# Altium PCB Ad Hoc Radio Node 2005 v5.PCBDOC
Units mm, origin at the board's own origin, x right, y up, seen from the top; angles counter-clockwise.
Board outline 127 x 101.6 mm, 4 copper layers (Top Layer, Internal Plane 1, Internal Plane 2, Bottom Layer); 68 components, 77 nets, 276 pads, 22 vias.
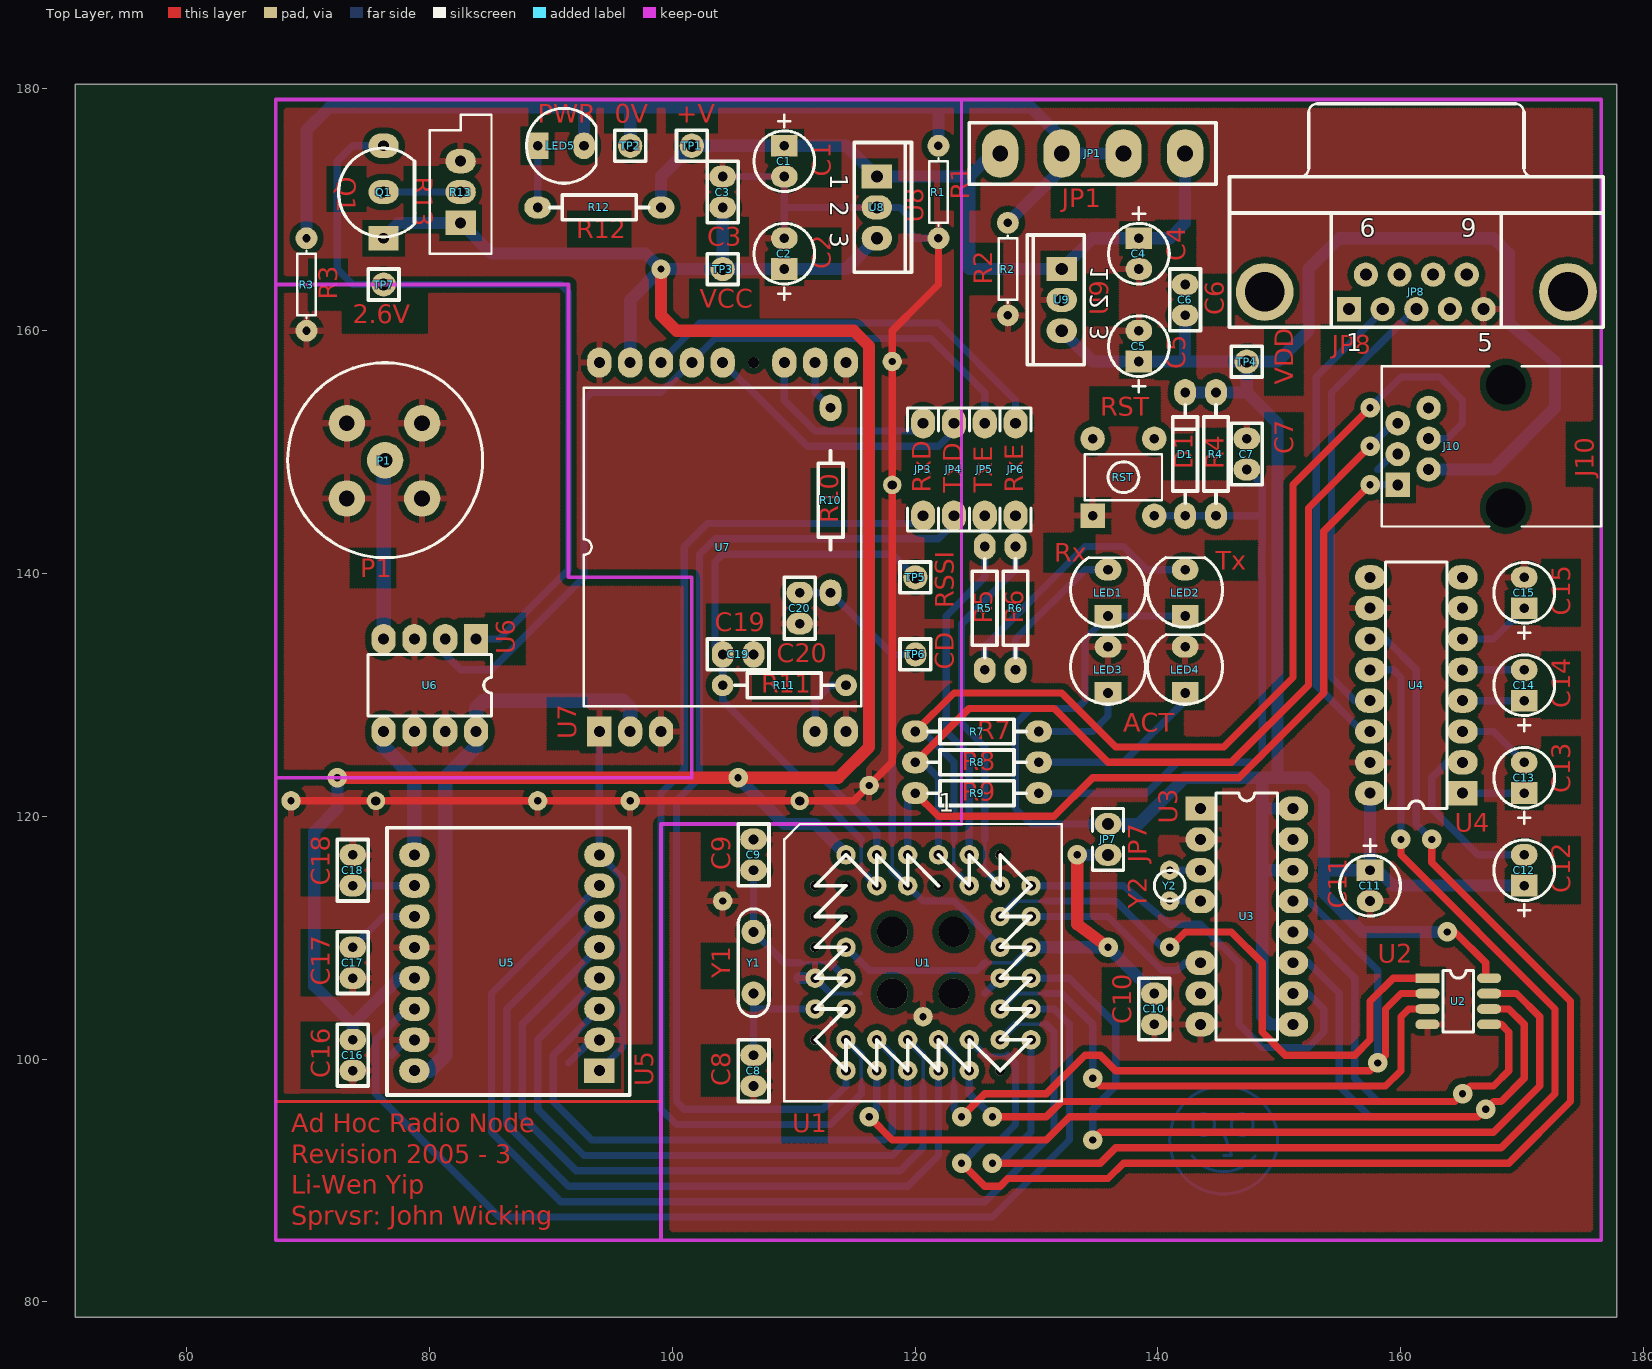
[diagram p0: Top Layer view]
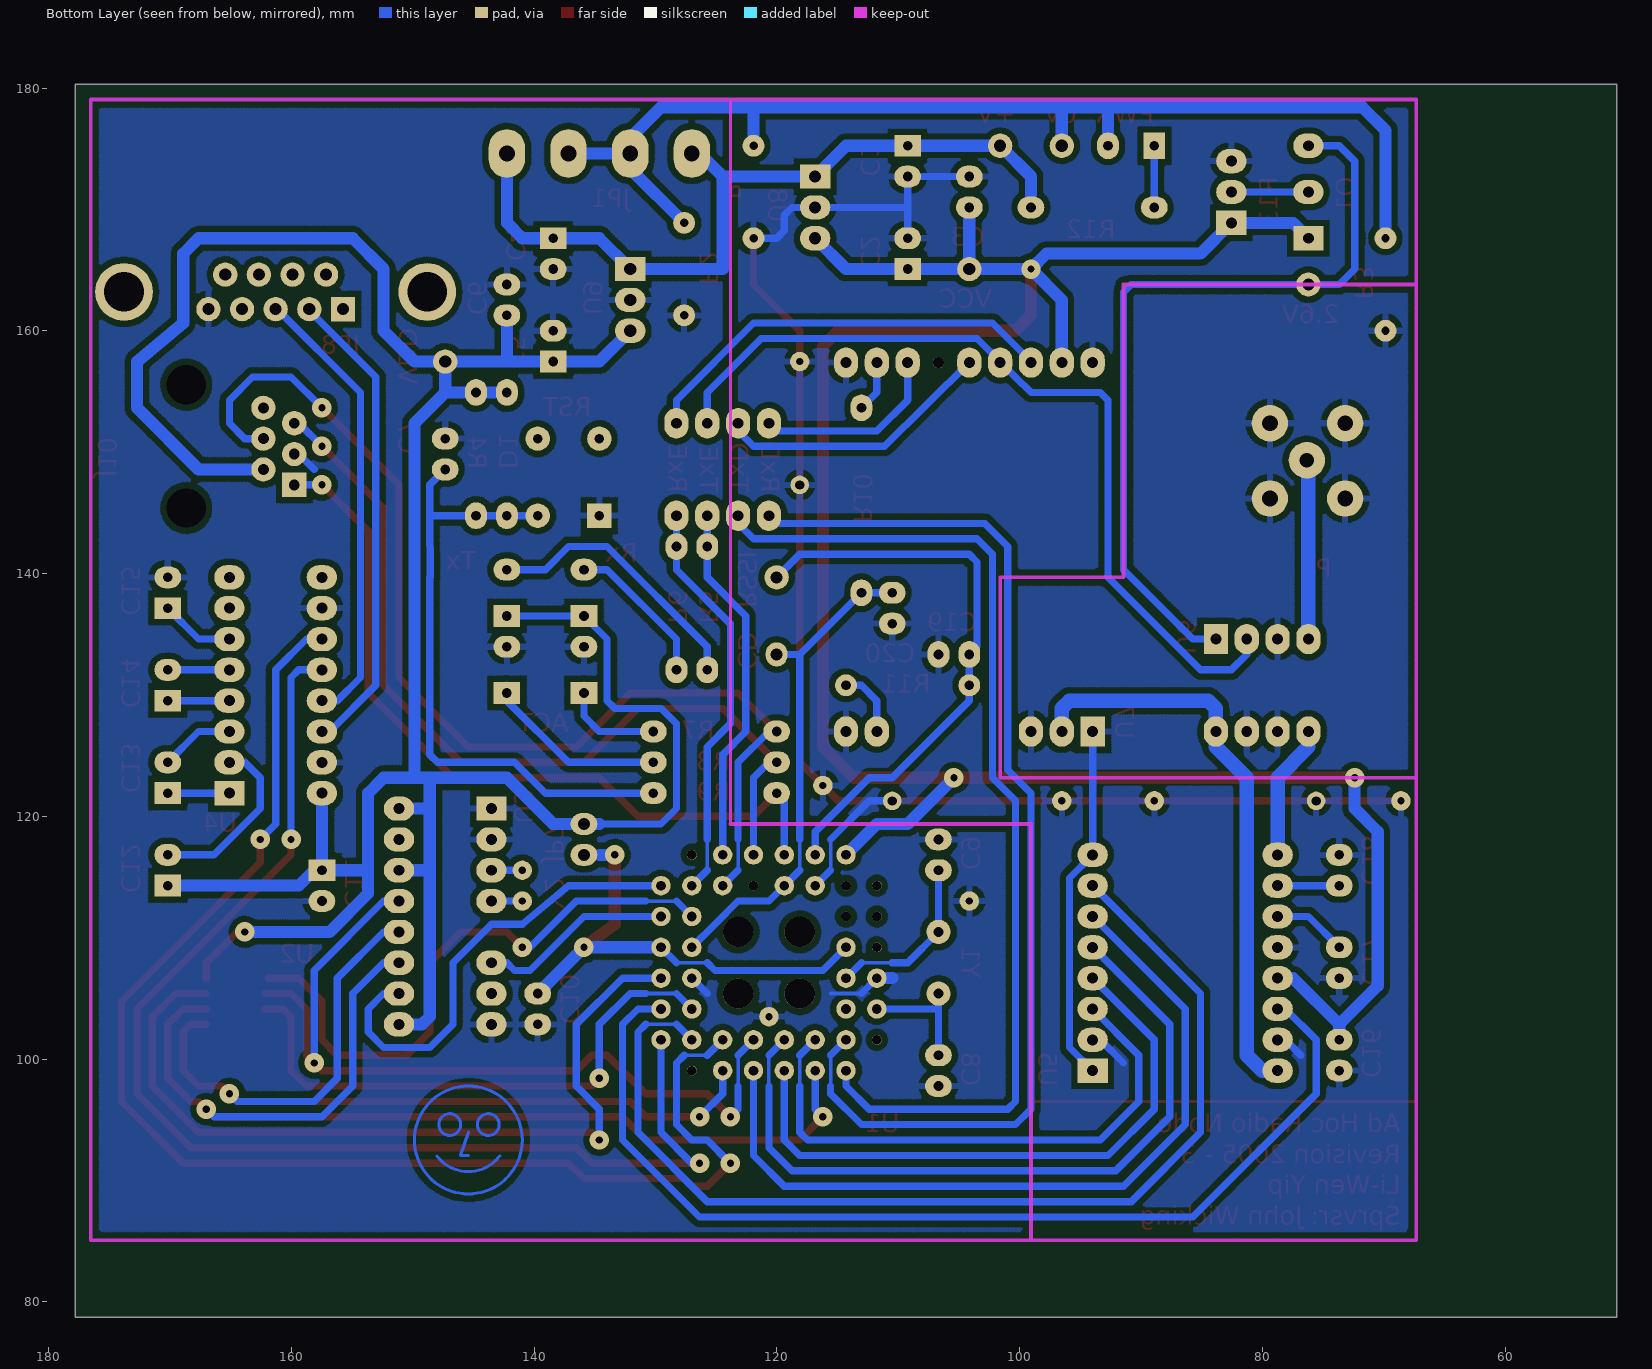
[diagram p1: Bottom Layer view, seen from below]
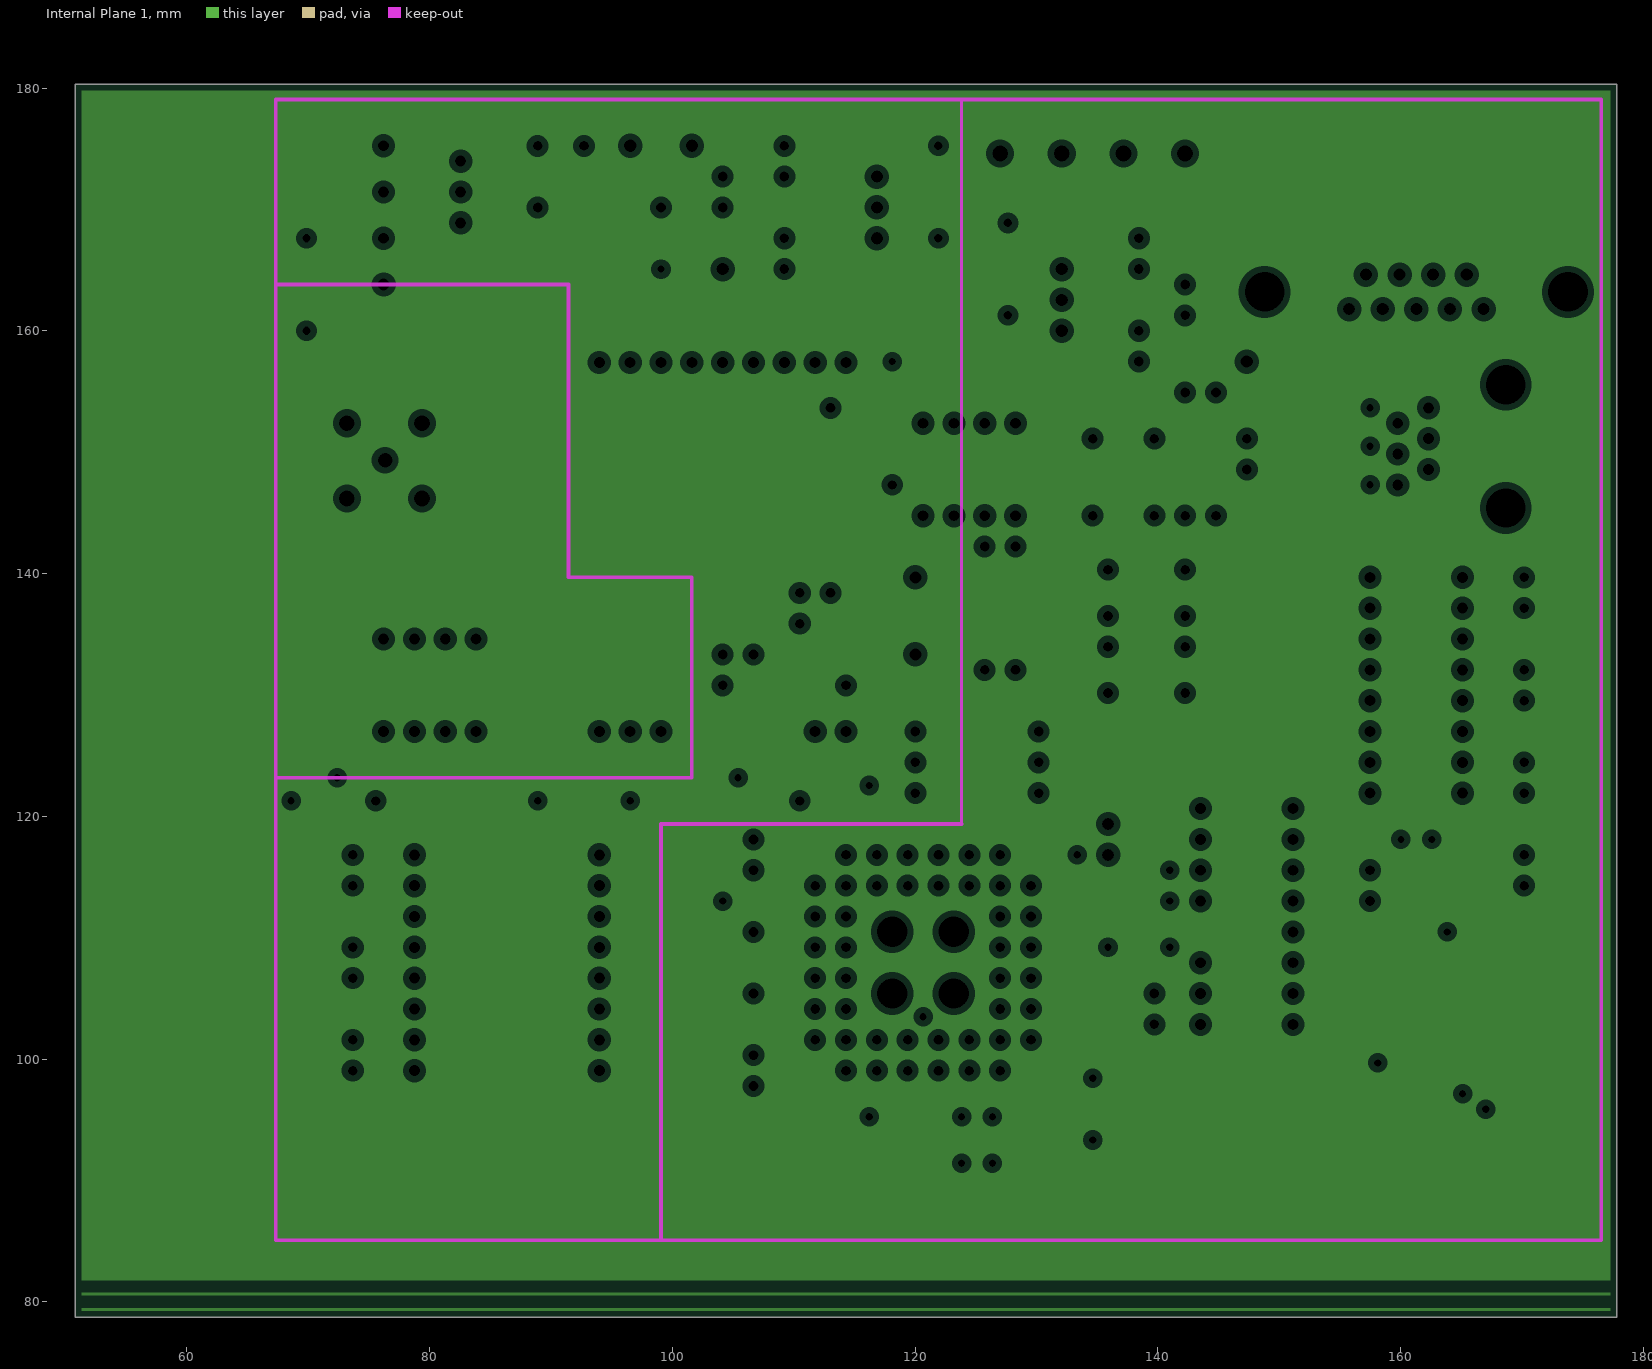
[diagram p2: Internal Plane 1, clearances drawn from the general rule]
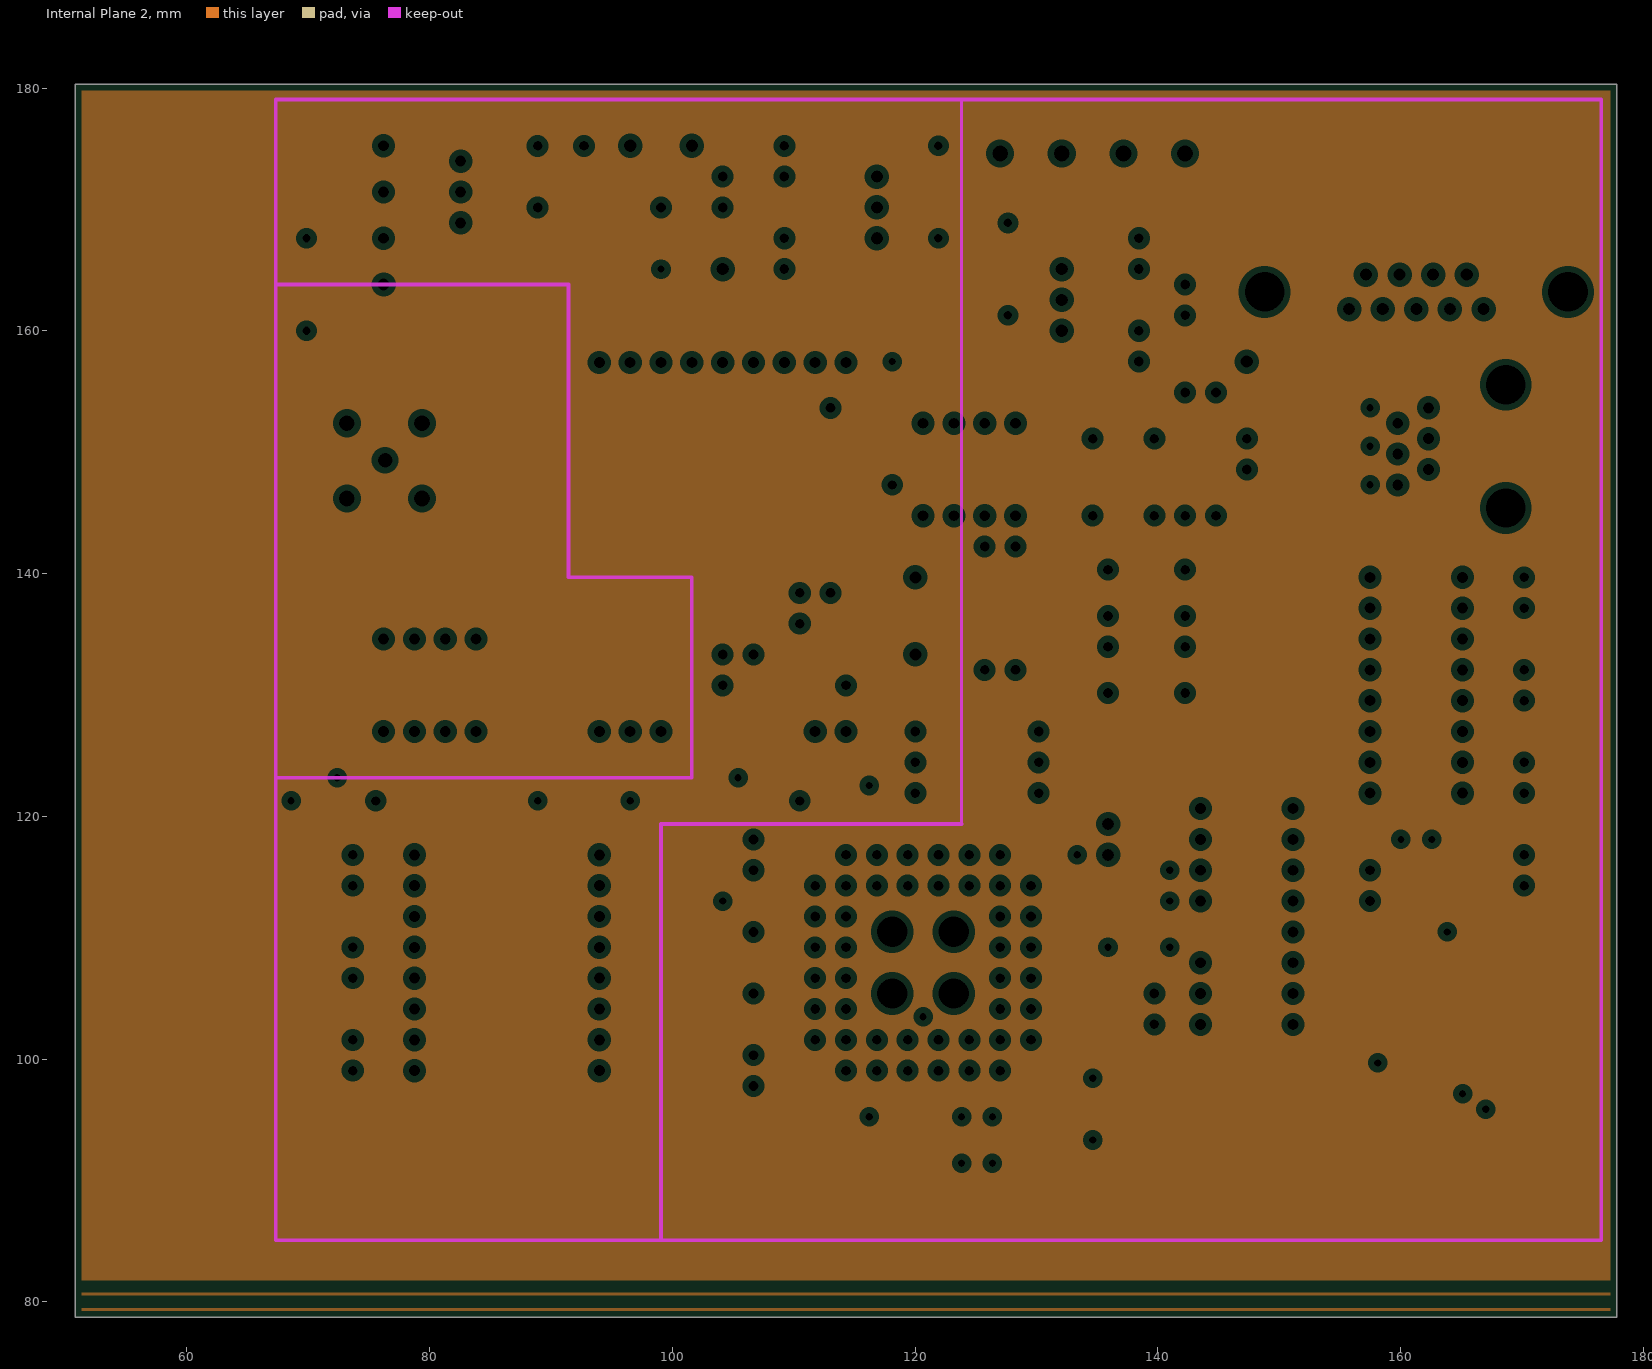
[diagram p3: Internal Plane 2, clearances drawn from the general rule]

## Layer stack, top to bottom
Top Layer: signal copper 0.0356
Dielectric: dielectric 0.32, FR-4, Dk 4.8
Internal Plane 1: plane copper 0.0356
Dielectric: dielectric 0.32, FR-4, Dk 4.8
Internal Plane 2: plane copper 0.0356
Dielectric: dielectric 0.32, FR-4, Dk 4.8
Bottom Layer: signal copper 0.0356

## Board outline
50.8,78.74 177.8,78.74 177.8,180.34 50.8,180.34

## Design rules (kind name [scope] priority, off if disabled: settings)
Clearance [All vs OnLayer('Keep-Out Layer')] p1: gap=0.5
Clearance Clearance_1 [All] p2: gap=0.5
ComponentClearance [All] p1: gap=0.254 collisioncheckmode=0
HoleSize [All] p1: absolutevalues=TRUE maxlimit=5 minlimit=0.6 maxpercent=80.000 minpercent=20.000
PlaneClearance [All] p1: clearance=0.508
PlaneConnect [All] p1: planeconnectstyle=Relief reliefexpansion=0.508 reliefentries=4 reliefconductorwidth=0.254 reliefairgap=0.254
PolygonConnect [All] p1: connectstyle=Relief reliefconductorwidth=0.5 reliefentries=4 polygonreliefangle="90 Angle"
RoomDefinition "Ad Hoc Radio Node 2005 v5" [InComponentClass('Ad Hoc Radio Node 2005 v5')] p1: confinementstyle=ConfineIn formatcopy=TRUE outline 0,0 50.8,0 50.8,25.4 0,25.4
RoutingLayers [All] p1: top layer=Horizontal bottom layer=Vertical
RoutingVias [All] p1: holewidth=0.6 width=1.6 viastyle="Through Hole" minholewidth=0.6 minwidth=1.6 maxholewidth=0.6 maxwidth=1.6
SolderMaskExpansion [All] p1: expansion=0.102
TestPointUsage [All] p1: valid=0 allowmultiple=FALSE
Testpoint [All] p1: side=15 testpointundercomponent=TRUE minsize=1.016 maxsize=2.54 preferedsize=1.524 minholesize=0 maxholesize=1.016 preferedholesize=0.813 testpointgrid=0.025 style=1023 order=1234567890
Width [All] p1: maxlimit=1.27 minlimit=0.3 preferedwidth=0.305 toplayer_prefwidth=0.6 bottomlayer_prefwidth=0.6 minimp=50.000000 maximp=50.000000 favimp=50.000000
13 further rules are at their usual default settings.

## Components (designator, comment, footprint, x,y, rotation, side; value= is the part's Value field where it differs from the comment)
C1 "Cap" "0.1 ELECTRO CAP" 109.22,175.26 r270 top
C2 "Cap" "0.1 ELECTRO CAP" 109.22,165.1 r90 top
C3 "Cap" "0.1 CERAMIC CAP" 106.68,172.72 r90 top
C4 "Cap" "0.1 ELECTRO CAP" 138.43,167.64 r270 top
C5 "Cap" "0.1 ELECTRO CAP" 138.43,157.48 r90 top
C6 "Cap" "0.1 CERAMIC CAP" 144.78,163.83 r90 top
C7 "0.1uF" "0.1 ceramic cap" 149.86,151.13 r90 top
C8 "Cap" "0.1 CERAMIC CAP" 109.22,100.33 r90 top (schematic designator C9)
C9 "Cap" "0.1 CERAMIC CAP" 104.14,115.57 r270 top (schematic designator C8)
C10 "" "0.1 CERAMIC CAP" 137.16,102.87 r270 top
C11 "Cap2" "0.1 ELECTRO CAP" 157.48,115.57 r270 top (schematic designator C14)
C12 "Cap2" "0.1 ELECTRO CAP" 170.18,114.3 r90 top (schematic designator C13)
C13 "Cap2" "0.1 ELECTRO CAP" 170.18,121.92 r90 top (schematic designator C11)
C14 "Cap2" "0.1 ELECTRO CAP" 170.18,129.54 r90 top (schematic designator C12)
C15 "Cap2" "0.1 ELECTRO CAP" 170.18,137.16 r90 top
C16 "" "0.1 CERAMIC CAP" 76.2,101.6 r90 top
C17 "" "0.1 CERAMIC CAP" 71.12,106.68 r270 top (schematic designator C18)
C18 "" "0.1 CERAMIC CAP" 76.2,116.84 r90 top (schematic designator C17)
C19 "Cap" "0.1 CERAMIC CAP" 106.68,130.81 r0 top
C20 "Cap" "0.1 CERAMIC CAP" 107.95,135.89 r270 top
D1 "1N914" DIODE-0.4/1.8 142.24,147.32 r90 top
J10 "43202-6101" JACK1.27-2H6 176.53,150.495 r90 top
JP1 "Header 4" "4 WAY TERMINAL BLOCK" 127,174.625 r0 top
JP3 "RxD" JUMPER-0.4 120.65,144.78 r90 top
JP4 "TxD" JUMPER-0.4 123.19,144.78 r90 top
JP5 "TxE" JUMPER-0.4 125.73,144.78 r90 top
JP6 "RxE" JUMPER-0.4 128.27,144.78 r90 top
JP7 "PWR" JUMPER 135.89,116.84 r90 top
JP8 "D Connector 9" DSUB1.385-2H9 161.29,172.72 r0 top
LED1 "Rx" "STD LED" 135.89,137.16 r90 top
LED2 "Tx" "STD LED" 142.24,137.16 r90 top
LED3 "ACT" "STD LED" 135.89,130.81 r90 top
LED4 "ACT" "STD LED" 142.24,130.81 r90 top
LED5 "PWR" "STD LED" 89.535,175.26 r0 top
P1 "" "PCB BNC CONNECTOR" 79.375,152.4 r270 top
Q1 "BC548" BJT 76.2,168.91 r90 top
R1 "" AXIAL-0.3 121.92,171.45 r270 top
R2 "" AXIAL-0.3 127.635,165.1 r270 top
R3 "" AXIAL-0.3 69.85,163.83 r270 top
R4 "Res1" AXIAL-0.4/1.8#1 144.78,147.32 r90 top (schematic designator R7)
R5 "" AXIAL-0.4/1.8#1 125.73,139.7 r270 top
R6 "" AXIAL-0.4/1.8#1 128.27,139.7 r270 top (schematic designator R4)
R7 "" AXIAL-0.4/1.8#1 122.555,127 r0 top (schematic designator R9)
R8 "" AXIAL-0.4/1.8#1 122.555,124.46 r0 top (schematic designator R10)
R9 "Res1" AXIAL-0.4/1.8#1 122.555,121.92 r0 top (schematic designator R8)
R10 "Res1" AXIAL-0.4/1.8#2 113.03,143.51 r90 top (schematic designator R12)
R11 "Res1" AXIAL-0.4/1.8#3 106.68,130.81 r0 top (schematic designator R13)
R12 "" AXIAL-0.4/1.8#1 96.52,170.18 r180 top (schematic designator R11)
R13 "RPot1" "VARIABLE RESISTOR" 82.55,171.45 r90 top (schematic designator R6)
RST "SW-PB" "RESET SWITCH" 134.62,144.145 r90 top
TP1 "+V" TESTPOINT#1 99.06,175.26 r0 top
TP2 "0V" TESTPOINT#1 93.98,175.26 r0 top
TP3 "VCC" TESTPOINT#1 104.14,167.64 r270 top
TP4 "VDD" TESTPOINT#1 147.32,160.02 r270 top
TP5 "RSSI" TESTPOINT#1 117.475,139.7 r0 top
TP6 "CD" TESTPOINT#2 117.475,133.35 r0 top
TP7 "2.6V" TESTPOINT#1 73.66,163.83 r0 top
U1 "PIC18C452_PLCC" "PLCC 44-WAY IC SOCKET" 111.76,116.84 r0 top
U2 "FRAM" SOP-8 162.205,106.68 r0 top
U3 "DS1306" DIP-16#1 143.51,120.65 r0 top
U4 "MAX232EPE" DIP-16#2 165.1,121.92 r180 top
U5 "" "AD8639 CARRIER BOARD" 93.98,99.06 r180 top
U6 "ADG918" DIP-8 83.82,134.62 r270 top
U7 "X2010 NBFM Transceiver" X2010 93.98,127 r90 top locked
U8 "LM340T5.0" SFM-T3/A4.7V 116.84,170.18 r270 top
U9 "LM340T5.0" SFM-T3/A4.7V 132.08,162.56 r270 top
Y1 "XTAL" XTAL 106.68,110.49 r270 top
Y2 "XTAL" "watch crystal" 143.51,114.3 r270 top

## Footprints (in the part's own frame and the unit in brackets; to place one, negate y for a bottom-side part, rotate by r counter-clockwise, add the part's x,y. Pads: shape width x height; smd on the part's side, far side on the other; paste and mask are expansions set on the pad)
"0.1 CERAMIC CAP" [mm]
  oval 1.8x2.2 hole 0.8: 1(-2.54,2.54) 2(0,2.54)
  silkscreen extent -3.81,1.27 1.27,3.81
"0.1 ceramic cap" [mm]
  oval 1.8x2.2 hole 0.8: 1(-2.54,2.54) 2(0,2.54)
  silkscreen extent -3.81,1.27 1.27,3.81
"0.1 ELECTRO CAP" [mm] "Electrolytic Cap"
  rect 1.8x2.2 hole 0.8: 1(0,0)
  oval 1.8x2.2 hole 0.8: 2(2.54,0)
  silkscreen extent -2.54,-2.5 3.77,2.5
"4 WAY TERMINAL BLOCK" [mm]
  oval 3x4 hole 1.3: 1(0,0) 2(5.08,0) 3(10.16,0) 4(15.24,0)
  silkscreen extent -2.54,-2.54 17.78,2.54
"AD8639 CARRIER BOARD" [mm]
  rect 2.5x2 hole 0.9: 1(0,0)
  oval 2.5x2 hole 0.9: 2(0,-2.54) 3(0,-5.08) 4(0,-7.62) 5(0,-10.16) 6(0,-12.7) 7(0,-15.24) 8(0,-17.78) 9(15.24,-17.78) 10(15.24,-15.24) 11(15.24,-12.7) 12(15.24,-10.16) 13(15.24,-7.62) 14(15.24,-5.08) 15(15.24,-2.54) 16(15.24,0)
  silkscreen extent -2.5,-20 17.5,2
AXIAL-0.3 [mm]
  round 1.8 hole 0.7: 1(-3.81,0) 2(3.81,0)
  silkscreen extent -2.77,-0.76 2.77,0.76
AXIAL-0.4/1.8#1 [mm]
  oval 2.2x1.8 hole 0.8: 1(-2.54,0) 2(7.62,0)
  silkscreen extent -1.52,-1.02 6.6,1.02
AXIAL-0.4/1.8#2 [mm]
  oval 2.2x1.8 hole 0.8: 1(-5.08,0) 2(10.16,0)
  silkscreen extent -1.52,-1.02 6.6,1.02
AXIAL-0.4/1.8#3 [mm]
  round 1.8 hole 0.8: 1(-2.54,0) 2(7.62,0)
  silkscreen extent -1.52,-1.02 6.6,1.02
BJT [mm]
  rect 2x2.5 hole 0.9: 1(-1.27,0)
  oval 2x2.5 hole 0.9: 2(2.54,0) 3(6.35,0)
  silkscreen extent -1.16,-2.54 6.15,3.71
DIODE-0.4/1.8 [mm]
  oval 2.2x1.8 hole 0.8: 1(-2.54,0) 2(7.62,0)
  silkscreen extent -1.52,-1.02 6.6,1.02
DIP-8 [mm]
  rect 2.5x2 hole 0.9: 1(0,0)
  oval 2.5x2 hole 0.9: 2(0,-2.54) 3(0,-5.08) 4(0,-7.62) 5(7.62,-7.62) 6(7.62,-5.08) 7(7.62,-2.54) 8(7.62,0)
  silkscreen extent 1.27,-8.89 6.35,1.27
DIP-16#1 [mm]
  rect 2.5x2 hole 0.9: 1(0,0)
  oval 2.5x2 hole 0.9: 2(0,-2.54) 3(0,-5.08) 4(0,-7.62) 6(0,-12.7) 7(0,-15.24) 8(0,-17.78) 9(7.62,-17.78) 10(7.62,-15.24) 11(7.62,-12.7) 12(7.62,-10.16) 13(7.62,-7.62) 14(7.62,-5.08) 15(7.62,-2.54) 16(7.62,0)
  silkscreen extent 1.27,-19.05 6.35,1.27
DIP-16#2 [mm]
  rect 2.5x2 hole 0.9: 1(0,0)
  oval 2.5x2 hole 0.9: 2(0,-2.54) 3(0,-5.08) 4(0,-7.62) 5(0,-10.16) 6(0,-12.7) 7(0,-15.24) 8(0,-17.78) 9(7.62,-17.78) 10(7.62,-15.24) 11(7.62,-12.7) 12(7.62,-10.16) 13(7.62,-7.62) 14(7.62,-5.08) 15(7.62,-2.54) 16(7.62,0)
  silkscreen extent 1.27,-19.05 6.35,1.27
DSUB1.385-2H9 [mm]
  rect 2x2 hole 1: 1(-5.54,-10.92)
  round 2 hole 1: 2(-2.77,-10.92) 3(0,-10.92) 4(2.77,-10.92) 5(5.54,-10.92) 6(-4.155,-8.08) 7(-1.385,-8.08) 8(1.385,-8.08) 9(4.155,-8.08)
  round 4.76 hole 3.26: 10(-12.495,-9.5) 11(12.495,-9.5)
  silkscreen extent -15.4,-12.4 15.4,6
JACK1.27-2H6 [mm]
  rect 2x2 hole 0.9: 1(-3.175,16.77)
  round 2 hole 0.9: 2(-1.905,14.23) 3(-0.635,16.77) 4(0.635,14.23) 5(1.905,16.77) 6(3.175,14.23)
  round 2.95 hole 3.25: MH1(-5.08,7.88) MH2(5.08,7.88)
  silkscreen extent -6.6,0 6.6,18.1
JUMPER [mm]
  oval 1.8x2.2 hole 1: 1(0,0) 2(2.54,0)
  silkscreen extent -1.27,-1.27 3.81,1.27
JUMPER-0.4 [mm]
  oval 2.5x2 hole 0.9: 1(0,0) 2(7.62,0)
  silkscreen extent -1.27,-1.27 8.89,1.27
"PCB BNC CONNECTOR" [mm]
  round 3 hole 1.2: 1(3.048,-3.048)
  round 3 hole 1.3: 2(0,0) 2(0,-6.2) 2(6.2,0) 2(6.2,-6.2)
  silkscreen extent -4.98,-11.08 11.08,4.98
"PLCC 44-WAY IC SOCKET" [mm]
  round 0.8 hole 0.8: 1(10.16,-2.54) 7(0,-2.54) 8(2.54,-2.54) 9(0,-5.08) 10(2.54,-5.08) 11(0,-7.62) 17(0,-15.24) 28(15.24,-17.78) 40(15.24,0)
  round 1.6 hole 0.8: 2(7.62,0) 3(7.62,-2.54) 4(5.08,0) 5(5.08,-2.54) 6(2.54,0) 12(2.54,-7.62) 13(0,-10.16) 14(2.54,-10.16) 15(0,-12.7) 16(2.54,-12.7) 18(2.54,-17.78) 19(2.54,-15.24) 20(5.08,-17.78) 21(5.08,-15.24) 22(7.62,-17.78) 23(7.62,-15.24) 24(10.16,-17.78) 25(10.16,-15.24) 26(12.7,-17.78) 27(12.7,-15.24) 29(17.78,-15.24) 30(15.24,-15.24) 31(17.78,-12.7) 32(15.24,-12.7) 33(17.78,-10.16) 34(15.24,-10.16) 35(17.78,-7.62) 36(15.24,-7.62) 37(17.78,-5.08) 38(15.24,-5.08) 39(17.78,-2.54) 41(15.24,-2.54) 42(12.7,0) 43(12.7,-2.54) 44(10.16,0)
  silkscreen extent -2.54,-20.32 20.32,2.54
"RESET SWITCH" [mm]
  rect 2x2 hole 0.8: 1(0.635,0)
  round 2 hole 0.8: 2(0.635,-5.08) ""(6.985,-5.08) ""(6.985,0)
  silkscreen extent 1.91,-5.71 5.71,0.64
SFM-T3/A4.7V [mm]
  rect 2x2.5 hole 1: 1(-2.54,0)
  oval 2x2.5 hole 1: 2(0,0) 3(2.54,0)
  silkscreen extent -5.35,-1.85 5.35,2.85
SOP-8 [mm]
  rect 2x0.8 smd: 1(0,0)
  oval 2x0.8 smd: 2(0,-1.27) 3(0,-2.54) 4(0,-3.81) 5(5.08,-3.81) 6(5.08,-2.54) 7(5.08,-1.27) 8(5.08,0)
  silkscreen extent 1.27,-4.44 3.81,0.64
"STD LED" [mm]
  rect 1.8x2.2 hole 0.8: 1(-0.635,0)
  oval 1.8x2.2 hole 0.8: 2(3.175,0)
  silkscreen extent -1.56,-3.09 4.17,3.09
TESTPOINT#1 [mm] "Test Point"
  round 2 hole 1: 1(2.54,0)
  silkscreen extent 1.27,-1.27 3.81,1.27
TESTPOINT#2 [mm] "Test Point"
  oval 1.8x2 hole 1: 1(2.54,0)
  silkscreen extent 1.27,-1.27 3.81,1.27
"VARIABLE RESISTOR" [mm]
  rect 2x2.5 hole 0.9: 1(-2.54,0)
  oval 2x2.5 hole 0.9: 2(2.54,0) 3(0,0)
  silkscreen extent -5.08,-2.54 6.35,2.54
"watch crystal" [mm]
  round 1.6 hole 0.6: 1(-1.27,-2.54) 2(1.27,-2.54)
  silkscreen extent -1.27,-3.81 1.27,-1.27
X2010 [mm]
  rect 2.5x2 hole 0.9: 1(0,0)
  oval 2.5x2 hole 0.9: 2(0,-2.54) 3(0,-5.08) 8(0,-17.78) 9(0,-20.32) 10(30.4,-20.32) 11(30.4,-17.78) 12(30.4,-15.24) 14(30.4,-10.16) 15(30.4,-7.62) 16(30.4,-5.08) 17(30.4,-2.54) 18(30.4,0)
  round 0.9 hole 0.9: 13(30.4,-12.7)
  silkscreen extent 2.08,-21.59 28.32,1.27
XTAL [mm] "Crystal"
  round 2 hole 0.8: 1(0,0) 2(5.08,0)
  silkscreen extent -1.9,-1.27 6.98,1.27

## Part data
C1 C2 C4 C5: library part Cap2, "Capacitor"
C3 C6 C8 C9 C11 C12 C13 C14 C15 C19 C20: "Capacitor"
C7: library part CAP, "Capacitor"
C10 C16 C17 C18: library part Cap, "Capacitor"
D1: library part Diode, "Default Diode"
J10: "Right Angle, Ultra Low Profile PCB Jack, Unshielded Version"
JP1: "Header, 4-Pin"
JP3 JP4 JP5 JP6 JP7: library part JUMPER
JP8: "Receptacle Assembly, 9 Position, Right Angle"
LED1 LED2 LED3 LED4 LED5: library part LED2, "Typical RED, GREEN, YELLOW, AMBER GaAs LED"
P1: library part "PCB BNC CONNECTOR"
Q1: library part NPN, "NPN Bipolar Transistor"
R1 R2 R3 R5 R6 R7 R8 R12: library part Res1, "Resistor"
R4 R9 R10 R11: "Resistor"
R13: "Potentiometer"
RST: "Switch"
TP1 TP2 TP3 TP4 TP5 TP6 TP7: library part TESTPOINT, "Test Point"
U4: "+5V Powered RS-232 Driver/Receiver"
U5: library part AD8369_DIGITAL_CONT_PWR_AMP
U7: library part NBFM_TRANSCEIVER
U8 U9: "Series 3-Terminal Positive Regulator"
Y1 Y2: "Crystal Oscillator"

## Free pads (board coordinates)
  round 1.6 hole 0.6: 0(116.205,122.555) 2(68.58,121.285) 6(104.14,113.03) 6(120.65,103.505) 7(118.11,157.48) 9(88.9,121.285) 10(96.52,121.285)
  round 1.524 hole 0.762: 1(118.11,147.32) 2(110.49,121.285) 3(75.565,121.285)
  round 2.5 hole 2.5: 2(118.11,105.41) 3(118.11,110.49) 4(123.19,110.49) 5(123.19,105.41)

## Via types
v1: diameter 1.6, hole 0.6, Top Layer to Bottom Layer, 22 vias

## Nets (pads, with @x,y where several pads share a name; then routed paths per layer and width w, separated by ;. In a path a pad name is that pad's centre, name@x,y a point inside that pad or via, vN(x,y) a via of type N, cw(c..) or ccw(c..) an arc to the next point about the centre after c; other vN are vias at no path point)
0V: JP1.2 JP1.3 LED5.2 R1.1 R2.1 R3.1 TP2.1 | length 96.4
  Bottom Layer w1: R3.1 69.85,176.53 71.755,178.435 129.54,178.435 132.08,175.895 132.08,173.355 R2.1 ; LED5.2 92.71,178.435 ; TP2.1 96.52,178.435 ; R1.1 121.92,178.435 ; JP1.2 JP1.3
2.6V: Q1.3 TP7.1 U6.1 | length 65.9
  Bottom Layer w0.6: Q1.3 73.66,175.26 72.39,173.99 72.39,165.1 73.66,163.83 90.805,163.83 91.44,163.195 91.44,140.335 85.725,134.62 U6.1
3.3V: Q1.2 R13.3 | length 6.3
  Bottom Layer w0.6: Q1.2 R13.3
ANTENNA: P1.1 U6.4 | length 14.6
  Bottom Layer w1.2: U6.4 P1.1@76.2,149.225
B0: U1.21 U5.3 | length 46.9
  Bottom Layer w0.3: 118.11,97.79 118.11,100.33
  Bottom Layer w0.6: U5.3 90.17,100.33 90.17,96.52 93.345,93.345 117.475,93.345 118.11,93.98 118.11,97.79 ; U1.21 118.11,100.33
B1: U1.22 U5.4 | length 51.2
  Bottom Layer w0.6: U5.4 88.9,101.6 88.9,95.885 92.71,92.075 118.11,92.075 119.38,93.345 U1.22
B2: U1.23 U5.5 | length 61.7
  Bottom Layer w0.3: 120.65,97.79 120.65,100.33
  Bottom Layer w0.6: U5.5 87.63,102.87 87.63,95.25 92.075,90.805 118.745,90.805 120.65,92.71 120.65,97.79 ; U1.23 120.65,100.33
B3: U1.24 U5.6 | length 66
  Bottom Layer w0.6: U5.6 86.36,104.14 86.36,94.615 91.44,89.535 119.38,89.535 121.92,92.075 U1.24
C1+: C13.1 U4.1 | length 5.1
  Bottom Layer w0.6: U4.1 C13.1
C1-: C13.2 U4.3 | length 6.1
  Bottom Layer w0.6: U4.3 167.64,127 C13.2
C2+: C14.1 U4.4 | length 5.1
  Bottom Layer w0.6: U4.4 C14.1
C2-: C14.2 U4.5 | length 5.1
  Bottom Layer w0.6: U4.5 C14.2
CD: R10.2 U7.11 | length 4.3
  Bottom Layer w0.6: U7.11 111.76,154.94 R10.2
CD_2: C20.1 R10.1 TP6.1 U1.3 U1.36 | length 40.9
  Bottom Layer w0.3: 118.11,115.57 118.11,118.11
  Bottom Layer w0.6: C20.1 R10.1 118.11,133.35 ; 118.11,115.57 120.65,113.03 123.19,113.03 125.095,111.125 U1.36 ; 118.11,118.11 118.11,133.35 ; TP6.1 118.11,133.35
CPUPWR: C10.1 JP7.1 U1.12 U1.35 | length 38.7
  Top Layer w1: v1(133.35,116.84) 133.35,111.125 v1(135.89,109.22)
  Bottom Layer w0.3: 125.73,107.95 128.27,107.95
  Bottom Layer w0.6: U1.12 116.205,107.315 125.095,107.315 125.73,107.95 ; 128.27,107.95 U1.35
  Bottom Layer w1: U1.35 v1(135.89,109.22) C10.1 ; v1(133.35,116.84) 134.62,116.84
DENB: U1.30 U5.7 | length 88.6
  Bottom Layer w0.3: 128.27,102.87 130.81,102.87
  Bottom Layer w0.6: U5.7 85.09,105.41 85.09,93.98 90.805,88.265 125.73,88.265 131.445,93.98 131.445,102.235 130.81,102.87 ; U1.30 128.27,102.87
FRAM_CS: U1.38 U2.1 | length 49.6
  Top Layer w0.6: v1(140.97,109.22) 142.24,110.49 146.05,110.49 148.59,107.95 148.59,102.235 150.495,100.33 156.21,100.33 157.48,101.6 157.48,104.775 159.385,106.68 U2.1@161.925,106.68
  Bottom Layer w0.3: 128.27,113.03 130.81,113.03
  Bottom Layer w0.6: U1.38 128.27,113.03 ; 130.81,113.03 132.715,113.03 136.525,113.03 140.335,109.22 v1(140.97,109.22)
GND: C4.2 C5.2 C6.2 C7.2 C8.1 C9.1 C10.2 C11.2 C15.2 J10.3 JP8.5 LED3.2 LED4.2 pad.6 R2.2 RST.1 U1.13 U1.34 U2.4 U3.1 U3.2 U3.8 U4.10 U4.15 U9.2 | length 9.6
  Bottom Layer w0.3: 113.03,105.41 115.57,105.41
  Bottom Layer w0.6: U1.13 113.03,105.41 ; 125.73,105.41 U1.34 ; 158.115,148.59 159.385,149.86 J10.3
  Bottom Layer w1: 110.49,106.68 U1.13
HOLD: U1.33 U2.7 | length 68.5
  Top Layer w0.6: v1(134.62,93.345) 135.255,93.98 167.64,93.98 171.45,97.79 171.45,103.505 169.545,105.41 U2.7@167.005,105.41
  Bottom Layer w0.6: U1.33 132.715,106.68 136.525,102.87 136.525,97.79 134.62,95.885 v1(134.62,93.345)
INT1: U1.37 U3.6 | length 16.1
  Bottom Layer w0.6: U1.37 135.89,111.76 140.335,107.315 141.605,107.315 142.24,107.95 U3.6
MCLR: J10.1 R9.1 U1.2 | length 64.6
  Top Layer w0.6: R9.1 121.92,120.015 131.445,120.015 134.62,123.19 146.685,123.19 153.67,130.175 153.67,143.51 v1(157.48,147.32)
  Bottom Layer w0.6: U1.2@119.38,117.475 119.38,121.285 R9.1 ; v1(157.48,147.32) J10.1@160.02,147.32
MISO: U1.25 U2.2 U3.13 | length 70
  Top Layer w0.6: v1(123.825,95.25) 125.73,97.155 130.81,97.155 133.985,100.33 135.255,100.33 136.525,99.06 157.48,99.06 158.75,100.33 158.75,104.14 160.02,105.41 U2.2
  Bottom Layer w0.3: 123.19,97.79 123.19,100.33
  Bottom Layer w0.6: U1.25 123.19,100.33 ; 123.19,97.79 123.19,95.885 v1(123.825,95.25) ; U3.13 152.4,113.03 158.115,107.315 v1(158.115,99.695)
MOSI: U1.26 U2.5 U3.12 | length 78.9
  Top Layer w0.6: v1(126.365,95.25) 130.81,95.25 132.08,96.52 164.465,96.52 165.735,97.79 167.64,97.79 168.91,99.06 168.91,102.235 168.275,102.87 U2.5@167.005,102.87
  Bottom Layer w0.6: U1.26 124.46,97.155 v1(126.365,95.25) ; U3.12 152.4,110.49 156.21,106.68 156.21,98.425 158.115,96.52 164.465,96.52 v1(165.1,97.155)
NetC12_2: C12.2 U4.2 | length 14.8
  Bottom Layer w0.6: U4.2 163.83,124.46 162.56,123.19 162.56,120.65 166.37,116.84 C12.2
NetC15_1: C15.1 U4.6 | length 6.1
  Bottom Layer w0.6: U4.6 167.64,134.62 C15.1
NetC17_1: C17.1 U5.11 | length 6.1
  Bottom Layer w0.6: C17.1 76.2,111.76 U5.11
NetC18_1: C18.1 U5.10 | length 5.1
  Bottom Layer w0.6: C18.1 U5.10
NetLED1_2: LED1.2 R6.2 | length 12.5
  Bottom Layer w0.6: R6.2 128.27,134.62 133.985,140.335 LED1.2
NetLED2_2: LED2.2 R5.2 | length 22.6
  Bottom Layer w0.6: R5.2 125.73,133.985 133.985,142.24 137.16,142.24 139.065,140.335 LED2.2
NetLED3_1: LED3.1 R7.2 | length 8.8
  Bottom Layer w0.6: R7.2 134.62,127 135.89,128.27 LED3.1@135.89,130.81
NetLED4_1: LED4.1 R8.2 | length 15.4
  Bottom Layer w0.6: R8.2 137.16,124.46 142.24,129.54 LED4.1@142.24,130.81
NetLED5_1: 
NetLED5_1: LED5.1 R12.2 | length 5.1
  Bottom Layer w0.6: R12.2 LED5.1
NetU1_16: U1.16
NetU3_3: U3.3 Y2.1 | length 2.5
  Bottom Layer w0.6: Y2.1 U3.3
NetU3_4: U3.4 Y2.2 | length 2.5
  Bottom Layer w0.6: Y2.2 U3.4
NetU3_7: U3.7
OSC1: C9.2 U1.14 Y1.1 | length 14.3
  Bottom Layer w0.3: 110.49,107.95 113.03,107.95
  Bottom Layer w0.6: C9.2 Y1.1 109.22,107.95 110.49,107.95 ; 113.03,107.95 U1.14
OSC2: C8.2 U1.15 Y1.2 | length 10.2
  Bottom Layer w0.6: C8.2 Y1.2 ; 106.68,104.14 U1.15
PWUP: U1.31 U5.14 | length 85.9
  Bottom Layer w0.6: U5.14 78.105,104.14 75.565,101.6 75.565,97.155 85.725,86.995 126.365,86.995 132.715,93.345 132.715,102.87 131.445,104.14 U1.31
R1IN: JP8.3 U4.13 | length 37.3
  Bottom Layer w0.6: U4.13 156.21,129.54 154.305,131.445 154.305,154.94 JP8.3@161.29,161.925
R1OUT: U1.29 U4.12 | length 102.9
  Top Layer w0.6: v1(126.365,91.44) 135.255,91.44 136.525,92.71 168.275,92.71 172.72,97.155 172.72,104.14 160.02,116.84 v1(160.02,118.11)
  Bottom Layer w0.6: v1(126.365,91.44) 127,91.44 129.54,93.98 U1.29 ; U4.12 159.385,132.08 160.02,131.445 v1(160.02,118.11)
RFGND: P1.2 R3.2 U5.1 U5.8 U6.3 U6.6 U6.7 U7.1 U7.3 | length 29.5
  Bottom Layer w0.6: U5.1 95.885,100.965 95.885,114.935 U5.8 U7.1
RSSI: R11.2 U7.8 | length 5.6
  Bottom Layer w0.6: U7.8 111.76,129.54 113.03,130.81 R11.2
RSSI_2: C19.1 R11.1 TP5.1 U1.4 | length 48.3
  Bottom Layer w0.6: U1.4 116.84,118.745 112.395,123.19 110.49,123.19 104.14,129.54 R11.1 C19.1 103.505,133.985 103.505,140.97 104.14,141.605 118.11,141.605 TP5.1
RST: C7.1 D1.1 R4.1 R9.2 RST.2 | length 53.2
  Bottom Layer w0.6: R9.2 139.065,121.92 141.605,124.46 147.955,124.46 148.59,125.095 148.59,139.7 ; RST.2@139.7,145.415 RST.2 D1.1 148.59,144.78 ; C7.1 148.59,147.32 148.59,144.78 ; 148.56,139.73 148.59,144.78
RTC_CS: U1.39 U3.10 | length 38
  Bottom Layer w0.6: U1.39 137.16,114.3 140.97,111.125 143.51,111.125 146.685,107.95 146.685,102.87 148.59,100.965 152.4,100.965 153.67,102.235 153.67,104.14 152.4,105.41 U3.10
RXACT: J10.4 R7.1 U1.43 | length 91.4
  Top Layer w0.6: R7.1 123.19,130.175 132.08,130.175 136.525,125.73 145.415,125.73 151.13,131.445 151.13,147.32 v1(157.48,153.67)
  Bottom Layer w0.3: 123.19,115.57 123.19,118.045
  Bottom Layer w0.6: R7.1 120.65,127 123.19,124.46 123.19,118.11 ; 123.19,115.57 U1.43 ; v1(157.48,153.67) 160.02,156.21 163.195,156.21 165.1,154.305 165.1,152.4 163.83,151.13 J10.4@161.925,151.13
RXD: JP3.2 U7.12 | length 15.9
  Bottom Layer w0.6: U7.12@109.22,157.48 109.22,156.845 109.22,154.305 111.76,151.765 120.015,151.765 JP3.2
RXD_2: JP3.1 U1.19 | length 90.9
  Bottom Layer w0.3: 115.57,97.79 115.57,100.33
  Bottom Layer w0.6: U1.19 115.57,100.33 ; 115.57,97.79 115.57,97.155 113.03,94.615 100.33,94.615 99.06,95.885 99.06,121.92 100.965,123.825 100.965,142.24 102.87,144.145 120.015,144.145 JP3.1
RXEN: JP6.2 U7.16 | length 35.1
  Bottom Layer w0.6: U7.16@99.06,157.48 102.235,160.655 121.92,160.655 128.27,154.305 JP6.2
RXEN_2: JP6.1 R6.1 U1.41 | length 33.6
  Bottom Layer w0.3: 125.73,115.57 125.73,118.11
  Bottom Layer w0.6: 125.73,115.57 U1.41 ; 125.73,118.11 125.73,125.73 123.825,127.635 123.825,135.89 128.27,140.335 JP6.1
SCLK: U1.20 U2.6 U3.11 | length 94.9
  Top Layer w0.6: v1(116.205,95.25) 118.11,93.345 130.81,93.345 132.715,95.25 166.37,95.25 167.64,96.52 168.275,96.52 170.18,98.425 170.18,102.87 168.91,104.14 U2.6@167.005,104.14
  Bottom Layer w0.6: v1(116.205,95.25) 116.84,95.885 U1.20 ; U3.11 152.4,107.95 154.94,105.41 154.94,97.79 157.48,95.25 166.37,95.25 v1(167.005,95.885)
SGND: C1.2 C2.2 C3.2 C16.1 C17.2 C18.2 C19.2 C20.2 pad.0 pad.1 pad.2@68.58,121.285 pad.2@110.49,121.285 pad.3@75.565,121.285 pad.7 pad.9 pad.10 R1.2 R13.2 U1.5 U5.2 U5.12 U5.15 U7.9 U7.10 U7.18 U8.2 | length 136.8
  Top Layer w0.6: pad.2@68.58,121.285 114.935,121.285 118.11,124.46 118.11,160.02 120.65,162.56 121.92,163.83 R1.2
  Bottom Layer w0.3: 115.57,115.57 115.57,118.11
  Bottom Layer w0.6: 76.835,100.33 78.105,101.6 U5.15 ; 91.44,99.695 93.345,101.6 U5.2 ; C3.2 106.045,172.72 C1.2 109.22,170.18 ; C2.2@109.22,168.275 109.22,170.18 ; pad.2@110.49,121.285 112.395,121.285 115.57,118.11 ; U7.9 U7.9@114.3,127.635 ; 115.57,115.57 U1.5 ; R1.2 120.015,167.64 119.38,168.275 119.38,169.545 118.745,170.18 U8.2 109.22,170.18
SUPPLY: C1.1 C4.1 JP1.1 JP1.4 R12.1 TP1.1 U8.1 U9.1 | length 66.1
  Bottom Layer w1: R12.1 99.06,172.72 TP1.1 114.3,175.26 U8.1 124.46,172.72 ; JP1.1 126.365,174.625 124.46,172.72 ; JP1.4 142.24,168.91 140.97,167.64 134.62,167.64 U9.1 127,165.1 124.46,165.1 124.46,172.72
T1IN: U1.27 U4.11 | length 115
  Top Layer w0.6: v1(123.825,91.44) 125.73,89.535 127,89.535 127.635,90.17 135.89,90.17 137.16,91.44 168.91,91.44 173.99,96.52 173.99,104.775 162.56,116.205 v1(162.56,118.11)
  Bottom Layer w0.3: 125.73,100.33 127.635,100.33
  Bottom Layer w0.6: v1(123.825,91.44) 125.73,93.345 127,93.345 128.27,94.615 128.27,99.695 127.635,100.33 ; U1.27 125.73,100.33 ; U4.11 158.75,134.62 161.29,132.08 161.29,119.38 v1(162.56,118.11)
T1OUT: JP8.2 U4.14 | length 39.5
  Bottom Layer w0.6: U4.14 156.845,127 153.035,130.81 153.035,156.21 JP8.2@158.75,161.925
TXACT: J10.5 R8.1 U1.44 | length 72
  Top Layer w0.6: R8.1 124.46,128.905 131.445,128.905 135.89,124.46 146.05,124.46 152.4,130.81 152.4,145.415 v1(157.48,150.495)
  Bottom Layer w0.6: R8.1 120.65,124.46 121.92,123.19 U1.44 ; v1(157.48,150.495) J10.5@159.385,152.4
TXD: JP4.2 U7.14 | length 23
  Bottom Layer w0.6: U7.14 111.125,150.495 121.92,150.495 123.19,151.765 JP4.2
TXD_2: JP4.1 U1.18 | length 84.8
  Bottom Layer w0.6: U1.18 114.3,97.79 112.395,95.885 100.965,95.885 100.33,96.52 100.33,121.285 102.235,123.19 102.235,141.605 103.505,142.875 121.92,142.875 123.19,144.145 JP4.1
TXEN: JP5.2 U6.2 U7.15 | length 70.4
  Bottom Layer w0.6: U6.2 81.28,133.35 82.55,132.08 85.09,132.08 92.71,139.7 92.71,154.305 93.345,154.94 99.06,154.94 U7.15 ; U7.15@101.6,157.48 103.505,159.385 121.285,159.385 125.73,154.94 JP5.2
TXEN_2: JP5.1 R5.1 U1.42 | length 30.7
  Bottom Layer w0.6: U1.42@124.46,117.475 U1.42 124.46,125.095 122.555,127 122.555,136.525 125.73,139.7 JP5.1
TXRFOUT: U5.16 U6.8 U7.2 | length 47.8
  Bottom Layer w1.2: U5.16 80.01,99.06 81.28,100.33 81.28,123.19 83.82,125.73 83.82,128.905 84.455,129.54 95.885,129.54 96.52,128.905 U7.2
TXRFOUT: 
TXRFOUT: 
TXRFOUT: 
TXRFOUT: 
TXRFOUT: 
TXRFOUT: 
TXRFOUT: 
TXRFOUT: 
TXRFOUT: 
VCC: C2.1 C3.1 C16.2 Q1.1 R13.1 TP3.1 U1.6 U5.13 U7.17 U8.3 | length 199.3
  Top Layer w1: v1(72.39,123.19) 113.665,123.19 116.205,125.73 116.205,158.75 114.935,160.02 100.33,160.02 99.06,161.29 v1(99.06,165.1)
  Bottom Layer w1: v1(72.39,123.19) 72.39,120.65 70.485,118.745 70.485,106.045 73.66,102.87 ; C16.2 73.66,102.87 ; Q1.1 77.47,168.91 R13.1 85.09,166.37 97.79,166.37 v1(99.06,165.1) ; U5.13 77.47,106.68 73.66,102.87 ; U7.17@96.52,157.48 96.52,162.56 v1(99.06,165.1) ; TP3.1 C3.1 ; v1(105.41,123.19) 109.22,119.38 111.76,119.38 U1.6 ; U8.3 114.3,165.1 108.585,165.1 v1(99.06,165.1)
VDD: C5.1 C6.1 C11.1 C12.1 D1.2 J10.2 JP7.2 LED1.1 LED2.1 R4.2 TP4.1 U2.8 U3.9 U3.14 U3.16 U4.16 U9.3 | length 248.4
  Top Layer w0.6: v1(163.83,110.49) 164.465,110.49 167.005,107.95 U2.8@167.005,106.68
  Bottom Layer w0.6: 134.62,119.38 129.54,119.38 128.27,120.65 128.27,127.635 129.54,128.905 133.35,128.905 133.985,129.54 133.985,134.62 LED1.1 LED2.1
  Bottom Layer w1: U9.3 134.62,157.48 149.86,157.48 152.4,160.02 152.4,165.1 154.94,167.64 167.64,167.64 168.91,166.37 168.91,160.655 172.72,157.48 172.72,153.67 167.64,148.59 J10.2@162.56,148.59 ; 134.62,119.38 138.43,119.38 142.24,123.19 152.4,123.19 153.67,121.92 153.67,113.665 156.845,110.49 v1(163.83,110.49) ; D1.2 147.32,154.94 ; 142.24,157.48 C6.1 ; TP4.1 147.32,154.94 ; 148.59,115.57 U3.14 ; 148.59,120.65 U3.16 ; 148.59,123.19 148.59,103.505 149.225,102.87 U3.9 ; 149.86,123.19 149.86,152.4 147.32,154.94 ; 153.67,115.57 C11.1 ; U4.16 C11.1 ; C12.1 159.385,114.3 158.115,115.57 C11.1
VGA_OUT: U5.9 U6.5 | length 11.2
  Bottom Layer w1.2: U6.5 76.2,125.73 78.74,123.19 U5.9
VREFH: 
WP: U1.32 U2.3 | length 46.7
  Top Layer w0.6: v1(134.62,98.425) 135.255,97.79 158.75,97.79 160.02,99.06 160.02,103.505 160.655,104.14 U2.3
  Bottom Layer w0.3: 128.27,105.41 130.81,105.41
  Bottom Layer w0.6: U1.32 128.27,105.41 ; 130.81,105.41 132.08,105.41 134.62,102.87 v1(134.62,98.425)
pads on no net: J10.6 J10.MH1 J10.MH2 JP8.1 JP8.4 JP8.6 JP8.7 JP8.8 JP8.9 JP8.10 JP8.11 RST. U1.1 U1.7 U1.8 U1.9 U1.10 U1.11 U1.17 U1.28 U1.40 U3.15 U4.7 U4.8 U4.9 U7.13
copper on no net: | length 79.6
  Top Layer w0.254: 67.31,96.52 99.06,96.52
  Bottom Layer w0.254: 142.825,92.037 ccw(c145.415,93.98) 148.005,92.037 ; 145.415,92.075 146.05,92.075 145.415,93.98 ; 144.671,94.615 ccw(c143.773,94.615) 144.671,94.615 ; 147.846,94.615 ccw(c146.948,94.615) 147.846,94.615 ; 149.86,93.345 ccw(c145.415,93.345) 149.86,93.345

## Polygon pours and split planes (outlines as drawn)
SGND on Top Layer (hatched 90Degree grid 0.127 track 0.254, remove dead copper): 67.31,179.07 123.825,179.07 123.825,119.38 99.06,119.38 99.06,85.09 67.31,85.09 67.31,123.19 101.6,123.19 101.6,139.7 91.44,139.7 91.44,163.83 67.31,163.83
RFGND on Top Layer (hatched 90Degree grid 0.2 track 0.25, remove dead copper): 67.31,163.83 91.44,163.83 91.44,139.7 101.6,139.7 101.6,123.19 67.31,123.19
GND on Top Layer (hatched 90Degree grid 0.2 track 0.25, remove dead copper): 99.06,85.09 99.06,119.38 123.825,119.38 123.825,179.07 176.53,179.07 176.53,85.09
RFGND on Bottom Layer (hatched 90Degree grid 0.2 track 0.25, remove dead copper): 67.31,163.83 91.44,163.83 91.44,139.7 101.6,139.7 101.6,123.19 67.31,123.19
SGND on Bottom Layer (hatched 90Degree grid 0.127 track 0.254, remove dead copper): 67.31,179.07 123.825,179.07 123.825,119.38 99.06,119.38 99.06,85.09 67.31,85.09 67.31,123.19 101.6,123.19 101.6,139.7 91.44,139.7 91.44,163.83 67.31,163.83
GND on Bottom Layer (hatched 90Degree grid 0.2 track 0.25, remove dead copper): 99.06,85.09 99.06,119.38 123.825,119.38 123.825,179.07 176.53,179.07 176.53,85.09
no net on Internal Plane 1 (split plane): 2295.398,299.779 2295.398,300.032 2421.382,300.032 2421.382,299.779
no net on Internal Plane 1 (split plane): 2295.398,301.049 2295.398,301.302 2421.382,301.302 2421.382,301.049
no net on Internal Plane 1 (split plane): 2295.398,302.319 2295.398,400.362 2421.382,400.362 2421.382,302.319
no net on Internal Plane 1 (split plane): 2295.398,401.379 2295.398,401.632 2421.382,401.632 2421.382,401.379
no net on Internal Plane 1 (split plane): 2295.398,402.649 2295.398,402.902 2421.382,402.902 2421.382,402.649
no net on Internal Plane 2 (split plane): 2295.398,299.779 2295.398,300.032 2421.382,300.032 2421.382,299.779
no net on Internal Plane 2 (split plane): 2295.398,301.049 2295.398,301.302 2421.382,301.302 2421.382,301.049
no net on Internal Plane 2 (split plane): 2295.398,302.319 2295.398,400.362 2421.382,400.362 2421.382,302.319
no net on Internal Plane 2 (split plane): 2295.398,401.379 2295.398,401.632 2421.382,401.632 2421.382,401.379
no net on Internal Plane 2 (split plane): 2295.398,402.649 2295.398,402.902 2421.382,402.902 2421.382,402.649

## Keep-outs
Keep-Out Layer:
  lines w0.254: 123.825,119.38 123.825,179.07
  lines w0.305: 67.31,123.19 101.6,123.19 101.6,139.7 91.44,139.7 91.44,163.83 67.31,163.83 ; 99.06,85.09 99.06,119.38 123.825,119.38 ; 67.31,85.09 67.31,179.07 176.53,179.07 176.53,85.09 67.31,85.09

## Other copper
Top Layer:
  text "Ad Hoc Radio Node" at 68.58,93.98 h1.52
  text "Revision 2005 - 3" at 68.58,91.44 h1.52
  text "Li-Wen Yip" at 68.58,88.9 h1.52
  text "Sprvsr: John Wicking" at 68.58,86.36 h1.52

## Dimensions
67.31,85.09 to 67.31,179.07 on Mechanical 1
67.31,85.09 to 176.53,85.09 on Mechanical 1

## Text inside footprints (layer, text, board x,y; h text height)
JP8: Top Overlay "1" at 155.5,158.345 h1.5; Top Overlay "5" at 166.33,158.345 h1.5; Top Overlay "9" at 164.945,167.745 h1.5; Top Overlay "6" at 156.635,167.745 h1.5
U1: Top Overlay "1" at 121.92,120.396 h1.52
U8: Top Overlay "2" at 113.015,170.68 h1.5 r270; Top Overlay "1" at 113.015,172.97 h1.5 r270; Top Overlay "3" at 113.015,168.14 h1.5 r270
U9: Top Overlay "2" at 135.905,163.06 h1.5 r90; Top Overlay "1" at 135.905,165.35 h1.5 r90; Top Overlay "3" at 135.905,160.52 h1.5 r90